# Allegro board PTB_V1_0.brd
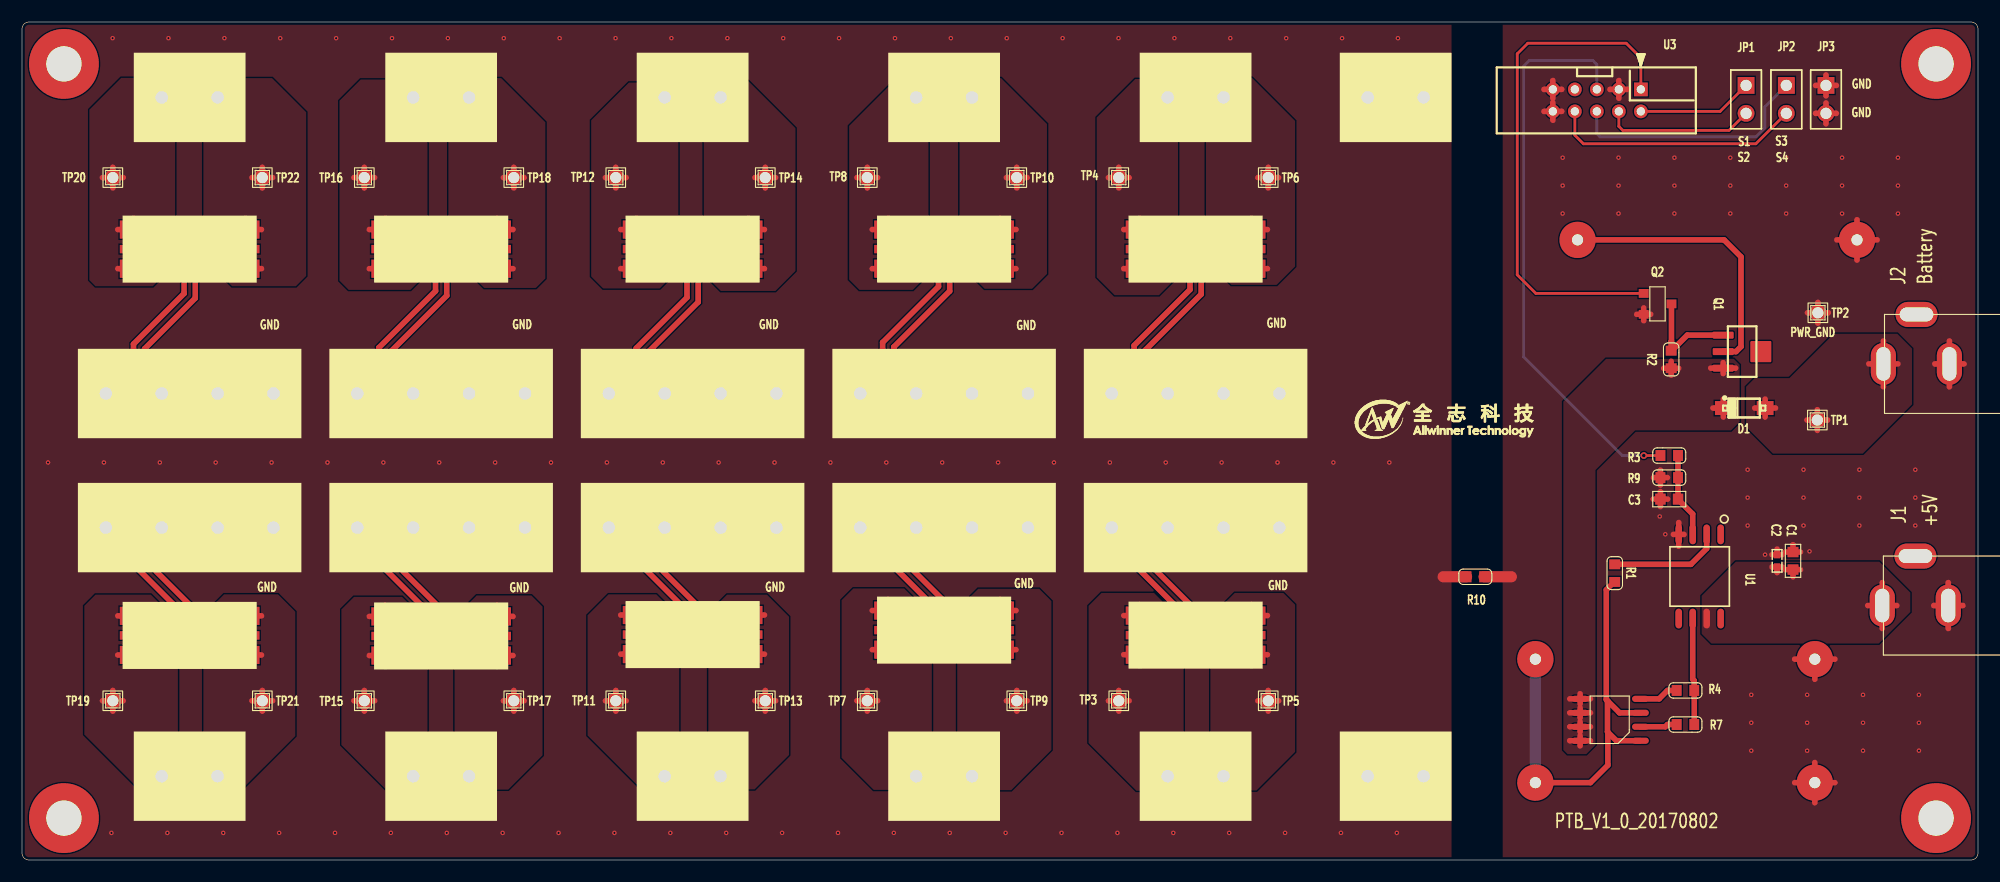
[diagram p0: board, top side]
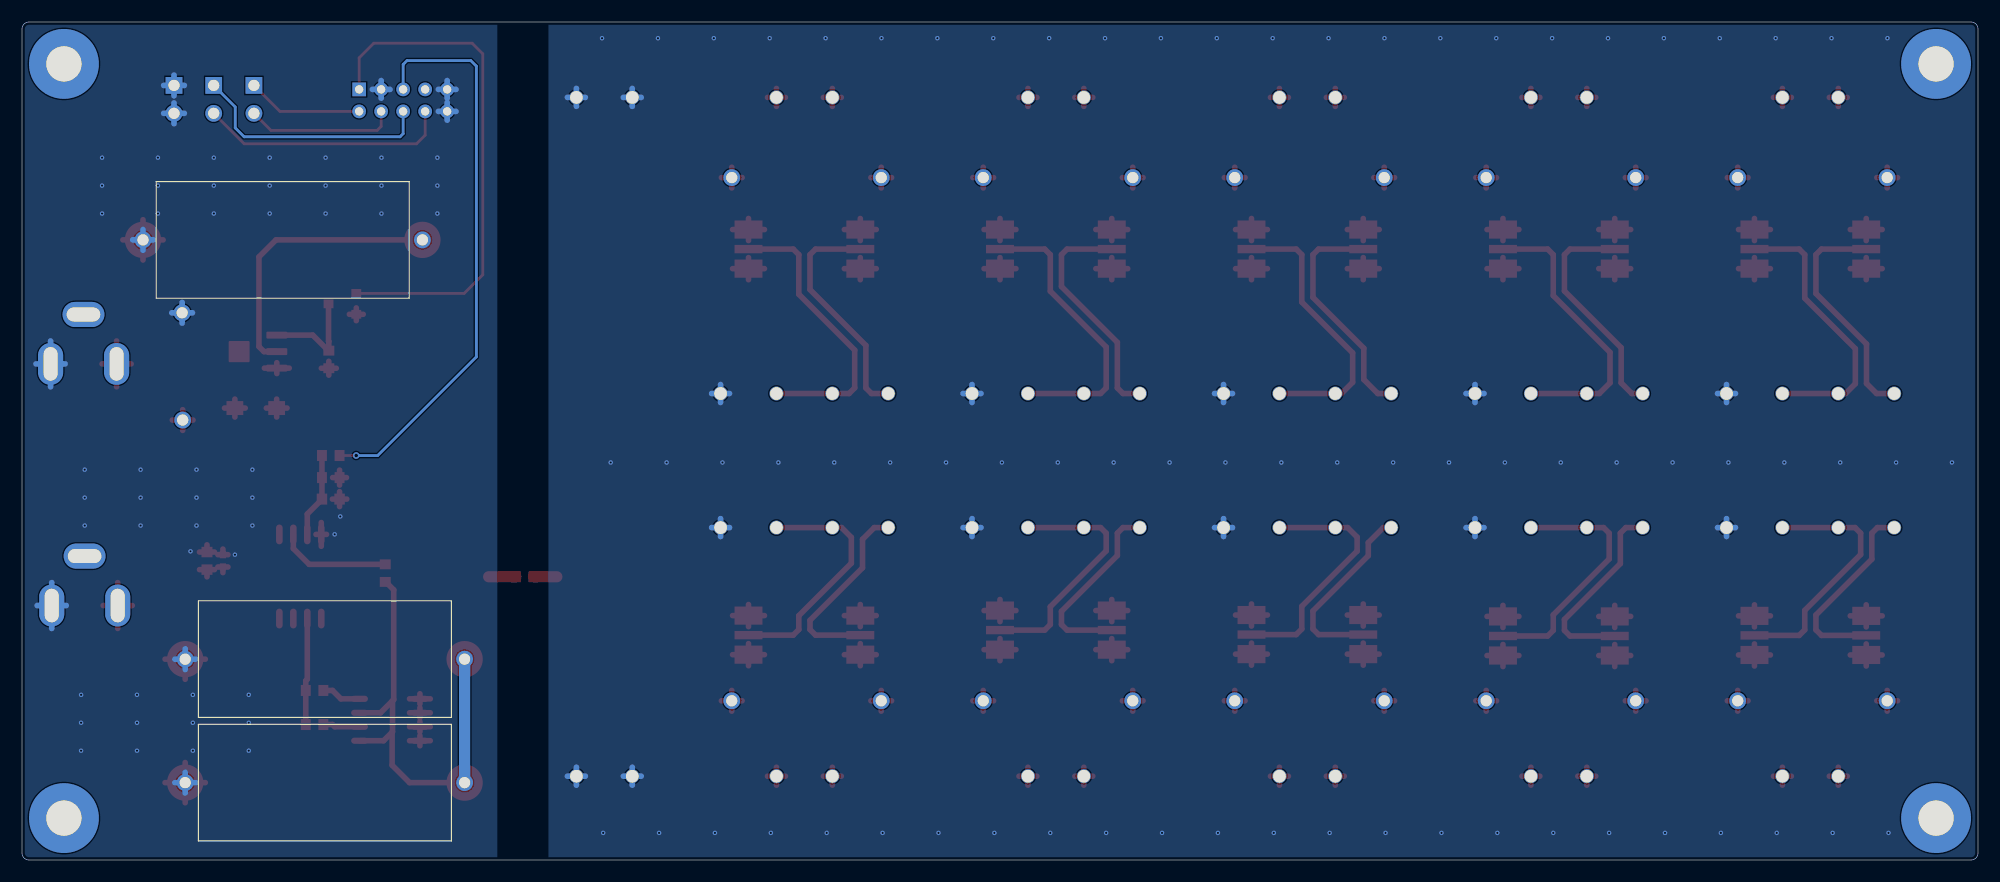
[diagram p1: board, bottom side, seen from below]

Outline 177.8 x 76.2 mm; copper layers: TOP, BOTTOM. Coordinates in mm from the lower left corner of the outline.
Outline path: 0,75.56 0,0.64 arc(0.19,0.19) 0.64,0 177.16,0 arc(177.61,0.19) 177.8,0.64 177.8,75.56 arc(177.61,76.01) 177.16,76.2 0.64,76.2 arc(0.19,76.01) 0,75.56

## Design rules (mm)
net group DP1: nets N15281681 N15281688
net group DP2: nets N15241367 N15241379
net group DP3: nets N15237127 N15237139
net group DP4: nets N15241519 N15241531
net group DP5: nets N15237638 N15237650
net group DP6: nets N15241743 N15241755
net group DP7: nets N15238147 N15238159
net group DP8: nets N15241967 N15241979
net group DP9: nets N15239532 N15239544
net group DP10: nets N15242243 N15242275

## Placement (name value [footprint] x y rotation side)
C1  10uF  [C0603]  160.99 27.2 270 top
C2  104  [C0402]  159.54 27.2 270 top
C3  104  [C0603]  149.73 32.82 0 top
CON1  CON2  [PWR2_448_304]  104.14 7.62 0 top
CON2  CON4  [PWR4_848_304]  99.06 30.23 0 top
CON3  CON2  [PWR2_448_304]  104.14 69.34 0 top
CON4  CON4  [PWR4_848_304]  99.06 42.42 0 top
CON5  CON2  [PWR2_448_304]  81.28 7.62 0 top
CON6  CON4  [PWR4_848_304]  76.2 30.23 0 top
CON7  CON2  [PWR2_448_304]  122.33 69.34 0 top
CON8  CON2  [PWR2_448_304]  81.28 69.34 0 top
CON9  CON4  [PWR4_848_304]  76.2 42.42 0 top
CON10  CON2  [PWR2_448_304]  58.42 7.62 0 top
CON11  CON4  [PWR4_848_304]  53.34 30.23 0 top
CON12  CON2  [PWR2_448_304]  58.42 69.34 0 top
CON13  CON4  [PWR4_848_304]  53.34 42.42 0 top
CON14  CON2  [PWR2_448_304]  35.56 7.62 0 top
CON15  CON4  [PWR4_848_304]  30.48 30.23 0 top
CON16  CON2  [PWR2_448_304]  122.33 7.62 0 top
CON17  CON2  [PWR2_448_304]  35.56 69.34 0 top
CON18  CON4  [PWR4_848_304]  30.48 42.42 0 top
CON19  CON2  [PWR2_448_304]  12.7 7.62 0 top
CON20  CON4  [PWR4_848_304]  7.62 30.23 0 top
CON21  CON2  [PWR2_448_304]  12.7 69.34 0 top
CON22  CON4  [PWR4_848_304]  7.62 42.42 0 top
D1  XBS104S14  [SOD123]  154.05 40.89 0 top
J1  DCIN  [PWR_JACK]  176.2 23.14 90 top
J2  DCOUT  [PWR_JACK]  176.3 45.11 90 top
JP1  GPIO  [SIP-2]  156.72 69.16 0 top
JP2  GPIO  [SIP-2]  160.38 69.16 0 top
JP3  GND  [SIP-2]  163.98 69.16 0 top
NOREF  -  [unnamed]  3.81 72.39 0 top
NOREF#2  -  [unnamed]  3.81 3.81 0 top
NOREF#3  -  [unnamed]  173.99 3.81 0 top
NOREF#4  -  [#2]  121.06 38.15 0 top
NOREF#5  -  [unnamed]  173.99 72.39 0 top
Q1  XP162A12A6PR  [SOT-89]  156.36 46.23 270 top
Q2  xp151  [SOT-23]  148.67 50.57 0 top
R1  0R  [R0603]  144.78 26.09 270 top
R2  100K  [R0603]  149.91 45.52 270 top
R3  0R  [R0603]  149.73 36.78 0 top
R4  0R  [R0603]  151.21 15.42 180 top
R5  4R  [SHUINI]  166.8 56.39 180 bottom
R6  4R  [SHUINI]  162.97 18.26 180 bottom
R7  0R  [R0603]  151.21 12.32 180 top
R8  4R  [SHUINI]  162.97 7.04 180 bottom
R9  10K  [R0603]  149.73 34.77 0 top
R10  0R  [R0603]  132.11 25.76 180 top
TP1  FD13  [TP_PAD]  163.19 40.01 0 top
TP2  FD12  [TP_PAD]  163.25 49.76 0 top
TP3  FD13  [TP_PAD]  99.69 14.48 0 top
TP4  FD13  [TP_PAD]  99.69 62.05 0 top
TP5  FD12  [TP_PAD]  113.28 14.48 0 top
TP6  FD12  [TP_PAD]  113.28 62.05 0 top
TP7  FD13  [TP_PAD]  76.83 14.48 0 top
TP8  FD13  [TP_PAD]  76.83 62.05 0 top
TP9  FD12  [TP_PAD]  90.42 14.48 0 top
TP10  FD12  [TP_PAD]  90.42 62.05 0 top
TP11  FD13  [TP_PAD]  53.98 14.48 0 top
TP12  FD13  [TP_PAD]  53.98 62.05 0 top
TP13  FD12  [TP_PAD]  67.56 14.48 0 top
TP14  FD12  [TP_PAD]  67.56 62.05 0 top
TP15  FD13  [TP_PAD]  31.11 14.48 0 top
TP16  FD13  [TP_PAD]  31.11 62.05 0 top
TP17  FD12  [TP_PAD]  44.7 14.48 0 top
TP18  FD12  [TP_PAD]  44.7 62.05 0 top
TP19  FD13  [TP_PAD]  8.26 14.48 0 top
TP20  FD13  [TP_PAD]  8.26 62.05 0 top
TP21  FD12  [TP_PAD]  21.84 14.48 0 top
TP22  FD12  [TP_PAD]  21.84 62.05 0 top
U1  OPA241UA  [SO8N]  152.5 25.78 270 top
U2  CSD88539ND  [SO8]  147.12 10.85 180 top
U3  -  [IDCN-10]  135.15 68.07 0 top
U4  100mR  [R1205]  101.6 22.23 0 top
U5  100mR  [R1205]  101.6 57.33 0 top
U6  100mR  [R1205]  78.74 22.68 0 top
U7  100mR  [R1205]  78.74 57.33 0 top
U8  100mR  [R1205]  55.88 22.28 0 top
U9  100mR  [R1205]  55.88 57.33 0 top
U10  100mR  [R1205]  33.02 22.15 0 top
U11  100mR  [R1205]  33.02 57.33 0 top
U12  100mR  [R1205]  10.16 22.2 0 top
U13  100mR  [R1205]  10.16 57.33 0 top

## Library data of the parts
C1 C2 = CAPACITOR
C3 = CAPACITOR_0
CON1 CON3 CON5 CON7 CON8 CON10 CON12 CON14 CON16 CON17 CON19 CON21 = CON2
CON2 CON4 CON6 CON9 CON11 CON13 CON15 CON18 CON20 CON22 = CON4
D1 = DIODE_SCHOTTKY: Tolerance: RichardLC
J1 J2 = BNC-2
JP1-JP3 = JUMPER-2_0: User Part Number: SIP-2
Q1 = MOSFET P DGS_0: Tolerance: RichardLC
Q2 = NMOS_xp151_SOT23_0
R1 R3 R4 R7 R9 R10 = R1_0805
R2 = RESISTOR
R5 R6 R8 = R
TP1-TP22 = T POINT S
U1 = OPA277_4
U2 = DUAL-NMOS
U3 = IDCN-10_0: Tolerance: RichardLC
U4-U13 = precise-R

## Footprints (pads in the part's own frame, mm; a bottom-side part is the same pattern mirrored in y, then rotated)
C0402
  rect 0.66x0.56 smd: 1(-0.56,0) 2(0.56,0)
C0603
  rect 0.95x1 smd: 1(-0.8,0) 2(0.8,0)
IDCN-10
  rect 1.246x1.246 hole 0.75: 1(12,2)
  round 1.246 hole 0.75: 2(12,0) 3(10,2) 4(10,0) 5(8,2) 6(8,0) 7(6,2) 8(6,0) 9(4,2) 10(4,0)
PWR2_448_304
  round 1.27 hole 1.143: 1(0,0) 2(5.08,0)
PWR4_848_304
  round 1.27 hole 1.143: 1(0,0) 2(5.08,0) 3(10.16,0) 4(15.24,0)
PWR_JACK
  oval 3.81x2.286 hole 3.048x1.27: 1(0,7.1) 2(0,1.1)
  oval 2.286x3.81 hole 1.27x3.048: 3(4.496,4.089)
R0603
  rect 0.9x1 smd: 1(-0.8,0) 2(0.8,0)
R1205
  rect 2.54x1.651 smd: 1(0,0) 3(0,-3.556) 4(10.16,0) 6(10.16,-3.556)
  rect 2.54x0.762 smd: 2(0,-1.778) 5(10.16,-1.778)
SHUINI
  round 3.3 hole 1.016: 1(0,0) 2(25.4,0)
SIP-2
  rect 1.524x1.524 hole 1.016: 1(0,1.27)
  round 1.524 hole 1.016: 2(0,-1.27)
SO8
  oval 1.524x0.559 smd: 1(0,0) 2(0,-1.27) 3(0,-2.54) 4(0,-3.81) 5(5.486,-3.81) 6(5.486,-2.54) 7(5.486,-1.27) 8(5.486,0)
SO8N
  oval 1.8x0.6 smd: 1(-3.825,1.905) 2(-3.825,0.635) 3(-3.825,-0.635) 4(-3.825,-1.905) 5(3.825,-1.905) 6(3.825,-0.635) 7(3.825,0.635) 8(3.825,1.905)
SOD123
  rect 1.524x1.27 smd: 1(4.399,0.201) 2(0.599,0.201)
SOT-23
  rect 0.9x0.8 smd: 1(-1.254,0.95) 2(-1.254,-0.95) 3(1.27,0)
SOT-89
  custom 1.93x1.9 smd: (0,1.7)
  custom 0.63x1.9 smd: 1(-1.5,-1.725) 2(0,-1.725) 3(1.5,-1.725)
TP_PAD
  round 1.524 hole 1.016: 1(0,0)
unnamed
  round 6.35 hole 3.2: (0,0)

## Nets
+5V: C1.2 C2.2 J1.1(CENTER1) U1.7(VDD/V+)
GND: CON2.4(GND) CON4.4(GND) CON6.4(GND) CON7.1(IN+) CON7.2(IN-) CON9.4(GND) CON11.4(GND) CON13.4(GND) CON15.4(GND) CON16.1(IN+) CON16.2(IN-) CON18.4(GND) CON20.4(GND) CON22.4(GND) R10.2
ATC-DAC(3.3): R3.1 U3.5
ATC-GPIO2: Q2.1(GATE) U3.1
BAT_IN: D1.2 Q1.3(S) R2.2 U2.5(D2_0) U2.6(D2_1) U2.7(D1_0) U2.8(D1_1)
GPIO2-S1: JP1.1 U3.2
GPIO2-S2: JP1.2 U3.4
GPIO2-S3: JP2.1 U3.6
GPIO2-S4: JP2.2 U3.8
PWR_GND: C1.1 C2.1 C3.1 J1.2(CENTER2) J2.2(CENTER2) JP3.1 JP3.2 Q2.2(SOURCE) R5.1 R6.1 R8.1 R9.1 R10.1 TP2.1(TP) U1.4(VSS/V-) U3.3 U3.9 U3.10
N15236078: CON1.1(IN+) TP3.1(TP) U4.1(IN) U4.3(.)
N15236116: CON1.2(IN-) TP5.1(TP) U4.4(OUT) U4.6(..)
N15237047: CON5.1(IN+) TP7.1(TP) U6.1(IN) U6.3(.)
N15237079: CON5.2(IN-) TP9.1(TP) U6.4(OUT) U6.6(..)
N15237127: CON6.1(VOUT+) U6.2(OUT+)
N15237139: CON6.2(VOUT-) CON6.3(VBUS) U6.5(OUT-)
N15237558: CON10.1(IN+) TP11.1(TP) U8.1(IN) U8.3(.)
N15237590: CON10.2(IN-) TP13.1(TP) U8.4(OUT) U8.6(..)
N15237638: CON11.1(VOUT+) U8.2(OUT+)
N15237650: CON11.2(VOUT-) CON11.3(VBUS) U8.5(OUT-)
N15238067: CON14.1(IN+) TP15.1(TP) U10.1(IN) U10.3(.)
N15238099: CON14.2(IN-) TP17.1(TP) U10.4(OUT) U10.6(..)
N15238147: CON15.1(VOUT+) U10.2(OUT+)
N15238159: CON15.2(VOUT-) CON15.3(VBUS) U10.5(OUT-)
N15239452: CON19.1(IN+) TP19.1(TP) U12.1(IN) U12.3(.)
N15239484: CON19.2(IN-) TP21.1(TP) U12.4(OUT) U12.6(..)
N15239532: CON20.1(VOUT+) U12.2(OUT+)
N15239544: CON20.2(VOUT-) CON20.3(VBUS) U12.5(OUT-)
N15241287: CON3.1(IN+) TP4.1(TP) U5.1(IN) U5.3(.)
N15241319: CON3.2(IN-) TP6.1(TP) U5.4(OUT) U5.6(..)
N15241367: CON4.1(VOUT+) U5.2(OUT+)
N15241379: CON4.2(VOUT-) CON4.3(VBUS) U5.5(OUT-)
N15241439: CON8.1(IN+) TP8.1(TP) U7.1(IN) U7.3(.)
N15241471: CON8.2(IN-) TP10.1(TP) U7.4(OUT) U7.6(..)
N15241519: CON9.1(VOUT+) U7.2(OUT+)
N15241531: CON9.2(VOUT-) CON9.3(VBUS) U7.5(OUT-)
N15241663: CON12.1(IN+) TP12.1(TP) U9.1(IN) U9.3(.)
N15241695: CON12.2(IN-) TP14.1(TP) U9.4(OUT) U9.6(..)
N15241743: CON13.1(VOUT+) U9.2(OUT+)
N15241755: CON13.2(VOUT-) CON13.3(VBUS) U9.5(OUT-)
N15241887: CON17.1(IN+) TP16.1(TP) U11.1(IN) U11.3(.)
N15241919: CON17.2(IN-) TP18.1(TP) U11.4(OUT) U11.6(..)
N15241967: CON18.1(VOUT+) U11.2(OUT+)
N15241979: CON18.2(VOUT-) CON18.3(VBUS) U11.5(OUT-)
N15242169: CON21.1(IN+) TP20.1(TP) U13.1(IN) U13.3(.)
N15242215: CON21.2(IN-) TP22.1(TP) U13.4(OUT) U13.6(..)
N15242243: CON22.1(VOUT+) U13.2(OUT+)
N15242275: CON22.2(VOUT-) CON22.3(VBUS) U13.5(OUT-)
N15242838: R1.1 U1.2(IN-)
N15242888: C3.2 R3.2 R9.2 U1.3(IN+)
N15248619: Q1.1(G) Q2.3(DRAIN) R2.1
N15248685: Q1.2(D) R5.2
N15263890: R1.2 R6.2 R8.2 U2.1(S1) U2.3(S2)
N15264303: R7.2 U2.2(G1)
N15264341: R4.2 U2.4(G2)
N15279686: D1.1 J2.1(CENTER1) TP1.1(TP)
N15281264: R4.1 R7.1 U1.6(OUT)
N15281681: CON2.1(VOUT+) U4.2(OUT+)
N15281688: CON2.2(VOUT-) CON2.3(VBUS) U4.5(OUT-)

Pads without a net: J1 3; J2 3; U1 1 5 8; U3 7

## Via types
v1: diameter 0.61, hole 0.33, TOP to BOTTOM, 1 via
v2: diameter 0.406, hole 0.203, TOP to BOTTOM, 122 vias

## Routing (per net, layer and track width the routed paths; a pad name or vN(x,y) marks a point on that pad's centre or on a via; arc(x,y) is an arc through that point)
+5V: length 10.2
  TOP w0.508: 169.1,21.06 J1.1 ; J1.1 167.78,23.14 ; J1.1 169.1,25.22 ; J1.1 170.42,23.14 ; 160.99,25.75 C1.2 ; C1.2 160.31,26.4 ; C1.2 161.66,26.4 ; 159.54,26.14 C2.2 ; C2.2 159.08,26.64 ; C2.2 160,26.64
GND: length 93.2
  TOP w0.508: CON11.4 68.58,31.04 ; CON11.4 68.58,29.41 ; CON11.4 69.39,30.23 ; CON11.4 67.77,30.23 ; 90.63,42.42 CON9.4 ; CON9.4 91.44,43.23 ; CON9.4 92.25,42.42 ; CON9.4 91.44,41.6 ; 127.41,6.81 CON16.2 ; CON16.2 126.59,7.62 ; CON16.2 128.22,7.62 ; CON16.2 127.41,8.43 ; CON2.4 114.3,31.04 ; CON2.4 115.11,30.23 ; CON2.4 113.49,30.23 ; CON2.4 114.3,29.41 ; CON18.4 46.53,42.42 ; CON18.4 44.91,42.42 ; CON18.4 45.72,41.6 ; CON18.4 45.72,43.23 ; CON7.1 122.33,70.16 ; CON7.1 123.14,69.34 ; CON7.1 122.33,68.53 ; CON7.1 121.51,69.34 ; 114.3,41.6 CON4.4 ; CON4.4 114.3,43.23 ; CON4.4 113.49,42.42 ; CON4.4 115.11,42.42 ; 45.72,29.41 CON15.4 ; CON15.4 44.91,30.23 ; CON15.4 46.53,30.23 ; CON15.4 45.72,31.04 ; 22.86,41.6 CON22.4 ; CON22.4 22.05,42.42 ; CON22.4 22.86,43.23 ; CON22.4 23.67,42.42 ; CON7.2 128.22,69.34 ; CON7.2 127.41,68.53 ; CON7.2 127.41,70.16 ; CON7.2 126.59,69.34 ; CON16.1 123.14,7.62 ; CON16.1 121.51,7.62 ; CON16.1 122.33,6.81 ; CON16.1 122.33,8.43 ; CON6.4 91.44,31.04 ; CON6.4 91.44,29.41 ; CON6.4 92.25,30.23 ; CON6.4 90.63,30.23 ; 68.58,41.6 CON13.4 ; CON13.4 67.77,42.42 ; CON13.4 68.58,43.23 ; CON13.4 69.39,42.42 ; CON20.4 22.86,31.04 ; CON20.4 23.67,30.23 ; CON20.4 22.05,30.23 ; CON20.4 22.86,29.41
  TOP w1.016: R10.2 129.18,25.76
  BOTTOM w0.508: 114.3,29.41 CON2.4 ; CON2.4 115.11,30.23 ; CON2.4 114.3,31.04 ; CON2.4 113.49,30.23 ; CON6.4 91.44,31.04 ; CON6.4 90.63,30.23 ; CON6.4 91.44,29.41 ; CON6.4 92.25,30.23 ; CON15.4 45.72,31.04 ; CON15.4 45.72,29.41 ; CON15.4 46.53,30.23 ; CON15.4 44.91,30.23 ; 121.51,69.34 CON7.1 ; CON7.1 122.33,68.53 ; CON7.1 123.14,69.34 ; CON7.1 122.33,70.16 ; 67.77,42.42 CON13.4 ; CON13.4 69.39,42.42 ; CON13.4 68.58,41.6 ; CON13.4 68.58,43.23 ; 114.3,41.6 CON4.4 ; CON4.4 114.3,43.23 ; CON4.4 113.49,42.42 ; CON4.4 115.11,42.42 ; CON9.4 92.25,42.42 ; CON9.4 90.63,42.42 ; CON9.4 91.44,41.6 ; CON9.4 91.44,43.23 ; CON20.4 23.67,30.23 ; CON20.4 22.05,30.23 ; CON20.4 22.86,29.41 ; CON20.4 22.86,31.04 ; CON16.1 123.14,7.62 ; CON16.1 121.51,7.62 ; CON16.1 122.33,6.81 ; CON16.1 122.33,8.43 ; CON11.4 69.39,30.23 ; CON11.4 67.77,30.23 ; CON11.4 68.58,29.41 ; CON11.4 68.58,31.04 ; 22.86,41.6 CON22.4 ; CON22.4 23.67,42.42 ; CON22.4 22.86,43.23 ; CON22.4 22.05,42.42 ; CON18.4 46.53,42.42 ; CON18.4 45.72,41.6 ; CON18.4 45.72,43.23 ; CON18.4 44.91,42.42 ; CON7.2 128.22,69.34 ; CON7.2 126.59,69.34 ; CON7.2 127.41,70.16 ; CON7.2 127.41,68.53 ; 127.41,6.81 CON16.2 ; CON16.2 128.22,7.62 ; CON16.2 126.59,7.62 ; CON16.2 127.41,8.43
  vias: v2(2.37,36.15) v2(7.45,36.15) v2(8.13,2.47) v2(8.23,74.73) v2(12.53,36.15) v2(13.21,2.47) v2(13.31,74.73) v2(17.61,36.15) v2(18.29,2.47) v2(18.39,74.73) v2(22.69,36.15) v2(23.37,2.47) v2(23.47,74.73) v2(27.77,36.15) v2(28.45,2.47) v2(28.55,74.73) v2(32.85,36.15) v2(33.53,2.47) v2(33.63,74.73) v2(37.93,36.15) v2(38.61,2.47) v2(38.71,74.73) v2(43.01,36.15) v2(43.69,2.47) v2(43.79,74.73) v2(48.09,36.15) v2(48.77,2.47) v2(48.87,74.73) v2(53.17,36.15) v2(53.85,2.47) v2(53.95,74.73) v2(58.25,36.15) v2(58.93,2.47) v2(59.03,74.73) v2(63.33,36.15) v2(64.01,2.47) v2(64.11,74.73) v2(68.41,36.15) v2(69.09,2.47) v2(69.19,74.73) v2(73.49,36.15) v2(74.17,2.47) v2(74.27,74.73) v2(78.57,36.15) v2(79.25,2.47) v2(79.35,74.73) v2(83.65,36.15) v2(84.33,2.47) v2(84.43,74.73) v2(88.73,36.15) v2(89.41,2.47) v2(89.51,74.73) v2(93.81,36.15) v2(94.49,2.47) v2(94.59,74.73) v2(98.89,36.15) v2(99.57,2.47) v2(99.67,74.73) v2(103.97,36.15) v2(104.65,2.47) v2(104.75,74.73) v2(109.05,36.15) v2(109.73,2.47) v2(109.83,74.73) v2(114.13,36.15) v2(114.81,2.47) v2(114.91,74.73) v2(119.21,36.15) v2(119.89,2.47) v2(119.99,74.73) v2(124.29,36.15) v2(124.97,2.47) v2(125.07,74.73)
ATC-DAC(3.3): length 51.9
  TOP w0.254: v1(147.42,36.78) R3.1
  BOTTOM w0.254: v1(147.42,36.78) 145.47,36.78 136.5,45.75 136.5,72.19 137.01,72.69 142.8,72.69 143.15,72.34 U3.5
ATC-GPIO2: length 47.3
  TOP w0.254: Q2.1 137.61,51.52 135.92,53.21 135.92,73.3 136.88,74.27 145.82,74.27 147.15,72.94 U3.1
BAT_IN: length 20.5
  TOP w0.508: U2.5 142.57,14.66 ; U2.5 141.63,15.11 ; U2.5 140.69,14.66 ; U2.5 141.63,14.2 ; R2.2 149.91,45.35 ; R2.2 149.23,44.72 ; R2.2 150.59,44.72 ; R2.2 149.91,44.09 ; U2.8 141.63,11.3 ; U2.8 141.63,10.39 ; U2.8 142.57,10.85 ; U2.8 140.69,10.85 ; U2.7 141.63,12.57 ; U2.7 142.57,12.12 ; U2.7 141.63,11.66 ; U2.7 140.69,12.12 ; Q1.3 154.64,45.22 ; Q1.3 155.77,44.73 ; Q1.3 154.64,44.23 ; Q1.3 153.51,44.73 ; 141.63,12.93 U2.6 ; U2.6 140.69,13.39 ; U2.6 141.63,13.84 ; U2.6 142.57,13.39 ; 153.71,41.09 D1.2 ; D1.2 155.59,41.09 ; D1.2 154.65,41.91 ; D1.2 154.65,40.28
GPIO2-S1: length 10.5
  TOP w0.254: JP1.1 154.36,68.07 U3.2
GPIO2-S2: length 13.7
  TOP w0.254: U3.4 145.15,66.71 145.52,66.34 155.17,66.34 JP1.2
GPIO2-S3: length 22.4
  BOTTOM w0.254: JP2.1 158.42,68.48 158.42,66.57 157.61,65.76 143.43,65.76 143.15,66.04 U3.6
GPIO2-S4: length 22.9
  TOP w0.254: JP2.2 157.61,65.13 141.94,65.13 141.15,65.91 U3.8
PWR_GND: length 117.1
  TOP w0.508: Q2.2 147.41,50.2 ; Q2.2 147.41,49.04 ; Q2.2 146.78,49.62 ; Q2.2 148.04,49.62 ; R5.1 168.63,56.39 ; R5.1 166.8,58.22 ; R5.1 166.8,54.56 ; R5.1 164.97,56.39 ; R6.1 164.79,18.26 ; R6.1 161.14,18.26 ; R6.1 162.97,16.43 ; U3.10 139.15,68.87 ; U3.10 139.15,67.27 ; U3.10 139.95,68.07 ; U3.10 138.35,68.07 ; J2.2 176.52,45.11 ; J2.2 175.2,43.03 ; J2.2 173.88,45.11 ; J2.2 175.2,47.19 ; C1.1 161.66,28 ; C1.1 160.99,28.66 ; C1.1 160.31,28 ; JP3.2 163.98,68.83 ; JP3.2 164.92,67.89 ; JP3.2 163.98,66.95 ; JP3.2 163.04,67.89 ; 138.35,70.07 U3.9 ; U3.9 139.15,70.87 ; U3.9 139.15,69.27 ; U3.9 139.95,70.07 ; 173.78,23.14 J1.2 ; J1.2 175.1,25.22 ; J1.2 175.1,21.06 ; J1.2 176.42,23.14 ; 145.15,69.27 U3.3 ; U3.3 145.95,70.07 ; U3.3 144.35,70.07 ; U3.3 145.15,70.87 ; R9.1 148.93,35.45 ; R9.1 148.93,34.09 ; R9.1 148.3,34.77 ; R9.1 149.56,34.77 ; TP2.1 164.19,49.76 ; TP2.1 163.25,48.82 ; TP2.1 162.31,49.76 ; TP2.1 163.25,50.7 ; C2.1 159.54,28.27 ; C2.1 160,27.76 ; C2.1 159.08,27.76 ; R8.1 164.79,7.04 ; R8.1 162.97,5.21 ; R8.1 162.97,8.86 ; R8.1 161.14,7.04 ; C3.1 149.59,32.82 ; C3.1 148.93,33.5 ; C3.1 148.93,32.14 ; C3.1 148.28,32.82 ; 150.6,28.53 U1.4 ; U1.4 150.6,30.68 ; U1.4 150.12,29.61 ; U1.4 151.07,29.61 ; JP3.1 164.92,70.43 ; JP3.1 163.98,69.49 ; JP3.1 163.04,70.43 ; JP3.1 163.98,71.37
  TOP w1.016: R10.1 135.38,25.76
  BOTTOM w0.508: U3.9 139.15,70.87 ; U3.9 139.15,69.27 ; U3.9 138.35,70.07 ; U3.9 139.95,70.07 ; JP3.1 163.98,71.37 ; JP3.1 164.92,70.43 ; JP3.1 163.04,70.43 ; JP3.1 163.98,69.49 ; 139.15,67.27 U3.10 ; U3.10 139.95,68.07 ; U3.10 138.35,68.07 ; U3.10 139.15,68.87 ; 162.31,49.76 TP2.1 ; TP2.1 164.19,49.76 ; TP2.1 163.25,48.82 ; TP2.1 163.25,50.7 ; 162.97,17.32 R6.1 ; R6.1 163.91,18.26 ; R6.1 162.03,18.26 ; R6.1 162.97,19.2 ; 175.2,43.03 J2.2 ; J2.2 175.2,47.19 ; J2.2 173.88,45.11 ; J2.2 176.52,45.11 ; J1.2 175.1,25.22 ; J1.2 175.1,21.06 ; J1.2 176.42,23.14 ; J1.2 173.78,23.14 ; U3.3 145.95,70.07 ; U3.3 145.15,69.27 ; U3.3 145.15,70.87 ; U3.3 144.35,70.07 ; JP3.2 164.92,67.89 ; JP3.2 163.98,68.83 ; JP3.2 163.98,66.95 ; JP3.2 163.04,67.89 ; 165.86,56.39 R5.1 ; R5.1 166.8,55.45 ; R5.1 167.74,56.39 ; R5.1 166.8,57.33 ; R8.1 163.91,7.04 ; R8.1 162.03,7.04 ; R8.1 162.97,6.1 ; R8.1 162.97,7.98
  vias: v2(140.04,63.86) v2(140.04,61.32) v2(140.04,58.78) v2(145.12,63.86) v2(145.12,61.32) v2(145.12,58.78) v2(148.87,31.24) v2(149.38,29.62) v2(150.2,63.86) v2(150.2,61.32) v2(150.2,58.78) v2(155.28,63.86) v2(155.28,61.32) v2(155.28,58.78) v2(156.86,35.49) v2(156.86,32.95) v2(156.86,30.41) v2(157.19,15.02) v2(157.19,12.48) v2(157.19,9.94) v2(158.45,27.76) v2(160.36,63.86) v2(160.36,61.32) v2(160.36,58.78) v2(161.94,35.49) v2(161.94,32.95) v2(161.94,30.41) v2(162.27,15.02) v2(162.27,12.48) v2(162.27,9.94) v2(162.48,28.07) v2(165.44,63.86) v2(165.44,61.32) v2(165.44,58.78) v2(167.02,35.49) v2(167.02,32.95) v2(167.02,30.41) v2(167.35,15.02) v2(167.35,12.48) v2(167.35,9.94) v2(170.52,63.86) v2(170.52,61.32) v2(170.52,58.78) v2(172.1,35.49) v2(172.1,32.95) v2(172.1,30.41) v2(172.43,15.02) v2(172.43,12.48) v2(172.43,9.94)
N15236078: length 16.8
  TOP w0.508: U4.3 101.6,19.67 ; U4.3 101.6,17.67 ; U4.3 100.15,18.67 ; U4.3 103.05,18.67 ; TP3.1 99.69,15.42 ; TP3.1 99.69,13.54 ; TP3.1 100.64,14.48 ; TP3.1 98.75,14.48 ; CON1.1 104.14,8.43 ; CON1.1 103.33,7.62 ; CON1.1 104.95,7.62 ; CON1.1 104.14,6.81 ; 100.15,22.23 U4.1 ; U4.1 103.05,22.23 ; U4.1 101.6,21.22 ; U4.1 101.6,23.23
N15236116: length 16.8
  TOP w0.508: U4.4 111.76,23.23 ; U4.4 110.31,22.23 ; U4.4 113.21,22.23 ; U4.4 111.76,21.22 ; TP5.1 113.28,15.42 ; TP5.1 114.22,14.48 ; TP5.1 113.28,13.54 ; TP5.1 112.34,14.48 ; 109.22,6.81 CON1.2 ; CON1.2 110.03,7.62 ; CON1.2 108.41,7.62 ; CON1.2 109.22,8.43 ; 110.31,18.67 U4.6 ; U4.6 111.76,19.67 ; U4.6 113.21,18.67 ; U4.6 111.76,17.67
N15237047: length 16.8
  TOP w0.508: U6.3 78.74,20.13 ; U6.3 77.29,19.13 ; U6.3 78.74,18.12 ; U6.3 80.19,19.13 ; 78.74,21.68 U6.1 ; U6.1 77.29,22.68 ; U6.1 80.19,22.68 ; U6.1 78.74,23.69 ; TP7.1 76.83,15.42 ; TP7.1 75.89,14.48 ; TP7.1 77.78,14.48 ; TP7.1 76.83,13.54 ; CON5.1 82.09,7.62 ; CON5.1 80.47,7.62 ; CON5.1 81.28,8.43 ; CON5.1 81.28,6.81
N15237079: length 16.8
  TOP w0.508: U6.4 88.9,23.69 ; U6.4 90.35,22.68 ; U6.4 88.9,21.68 ; U6.4 87.45,22.68 ; 85.55,7.62 CON5.2 ; CON5.2 87.17,7.62 ; CON5.2 86.36,6.81 ; CON5.2 86.36,8.43 ; 90.42,13.54 TP9.1 ; TP9.1 89.48,14.48 ; TP9.1 90.42,15.42 ; TP9.1 91.36,14.48 ; 87.45,19.13 U6.6 ; U6.6 88.9,18.12 ; U6.6 90.35,19.13 ; U6.6 88.9,20.13
N15237127: length 17.4
  TOP w0.508: CON6.1 77.72,30.23 78.23,29.72 78.23,27.69 83.31,22.61 83.31,21.41 82.8,20.9 U6.2
N15237139: length 22.5
  TOP w0.508: U6.5 84.84,20.9 84.33,21.41 84.33,23.03 79.25,28.11 79.25,29.72 79.76,30.23 CON6.2 CON6.3
N15237558: length 16.8
  TOP w0.508: CON10.1 58.42,8.43 ; CON10.1 59.23,7.62 ; CON10.1 57.61,7.62 ; CON10.1 58.42,6.81 ; 54.43,18.72 U8.3 ; U8.3 55.88,17.72 ; U8.3 57.33,18.72 ; U8.3 55.88,19.72 ; TP11.1 53.98,15.42 ; TP11.1 53.03,14.48 ; TP11.1 53.98,13.54 ; TP11.1 54.92,14.48 ; 54.43,22.28 U8.1 ; U8.1 57.33,22.28 ; U8.1 55.88,23.28 ; U8.1 55.88,21.27
N15237590: length 16.8
  TOP w0.508: 62.69,7.62 CON10.2 ; CON10.2 64.31,7.62 ; CON10.2 63.5,8.43 ; CON10.2 63.5,6.81 ; 66.04,17.72 U8.6 ; U8.6 64.59,18.72 ; U8.6 66.04,19.72 ; U8.6 67.49,18.72 ; U8.4 67.49,22.28 ; U8.4 66.04,21.27 ; U8.4 66.04,23.28 ; U8.4 64.59,22.28 ; 66.62,14.48 TP13.1 ; TP13.1 68.5,14.48 ; TP13.1 67.56,15.42 ; TP13.1 67.56,13.54
N15237638: length 17.4
  TOP w0.508: CON11.1 54.05,30.23 55.42,28.85 55.42,27.67 60.45,22.64 60.45,21.01 59.94,20.5 U8.2
N15237650: length 22.6
  TOP w0.508: U8.5 61.98,20.5 61.47,21.01 61.47,23.06 56.44,28.09 56.44,29.36 57.3,30.23 CON11.2 CON11.3
N15238067: length 16.8
  TOP w0.508: 31.11,13.54 TP15.1 ; TP15.1 31.11,15.42 ; TP15.1 30.17,14.48 ; TP15.1 32.06,14.48 ; U10.1 34.47,22.15 ; U10.1 33.02,23.15 ; U10.1 31.57,22.15 ; U10.1 33.02,21.14 ; U10.3 34.47,18.59 ; U10.3 33.02,19.6 ; U10.3 31.57,18.59 ; U10.3 33.02,17.59 ; CON14.1 35.56,8.43 ; CON14.1 35.56,6.81 ; CON14.1 34.75,7.62 ; CON14.1 36.37,7.62
N15238099: length 16.8
  TOP w0.508: 41.73,22.15 U10.4 ; U10.4 44.63,22.15 ; U10.4 43.18,21.14 ; U10.4 43.18,23.15 ; CON14.2 40.64,8.43 ; CON14.2 40.64,6.81 ; CON14.2 41.45,7.62 ; CON14.2 39.83,7.62 ; U10.6 44.63,18.59 ; U10.6 41.73,18.59 ; U10.6 43.18,17.59 ; U10.6 43.18,19.6 ; 44.7,13.54 TP17.1 ; TP17.1 43.76,14.48 ; TP17.1 45.64,14.48 ; TP17.1 44.7,15.42
N15238147: length 18
  TOP w0.508: U10.2 37.08,20.37 37.59,20.88 37.59,21.87 32.51,26.95 32.51,29.72 32,30.23 CON15.1
N15238159: length 23
  TOP w0.508: U10.5 39.12,20.37 38.61,20.88 38.61,22.29 33.53,27.37 33.53,29.72 34.04,30.23 CON15.2 CON15.3
N15239452: length 16.8
  TOP w0.508: TP19.1 9.2,14.48 ; TP19.1 7.31,14.48 ; TP19.1 8.26,13.54 ; TP19.1 8.26,15.42 ; U12.1 11.61,22.2 ; U12.1 10.16,21.2 ; U12.1 10.16,23.2 ; U12.1 8.71,22.2 ; CON19.1 13.51,7.62 ; CON19.1 12.7,8.43 ; CON19.1 11.89,7.62 ; CON19.1 12.7,6.81 ; U12.3 11.61,18.64 ; U12.3 10.16,17.64 ; U12.3 10.16,19.65 ; U12.3 8.71,18.64
N15239484: length 16.8
  TOP w0.508: 21.84,13.54 TP21.1 ; TP21.1 20.9,14.48 ; TP21.1 22.78,14.48 ; TP21.1 21.84,15.42 ; CON19.2 17.78,8.43 ; CON19.2 18.59,7.62 ; CON19.2 17.78,6.81 ; CON19.2 16.97,7.62 ; U12.4 20.32,23.2 ; U12.4 20.32,21.2 ; U12.4 21.77,22.2 ; U12.4 18.87,22.2 ; U12.6 21.77,18.64 ; U12.6 20.32,19.65 ; U12.6 18.87,18.64 ; U12.6 20.32,17.64
N15239532: length 17.9
  TOP w0.508: U12.2 14.22,20.42 14.73,20.93 14.73,22.28 9.65,27.36 9.65,29.72 9.14,30.23 CON20.1
N15239544: length 23
  TOP w0.508: U12.5 16.26,20.42 15.75,20.93 15.75,22.7 10.67,27.78 10.67,29.72 11.18,30.23 CON20.2 CON20.3
N15241287: length 16.8
  TOP w0.508: 104.14,68.53 CON3.1 ; CON3.1 104.95,69.34 ; CON3.1 104.14,70.16 ; CON3.1 103.33,69.34 ; 100.15,53.77 U5.3 ; U5.3 101.6,54.78 ; U5.3 101.6,52.77 ; U5.3 103.05,53.77 ; TP4.1 100.64,62.05 ; TP4.1 99.69,61.11 ; TP4.1 99.69,62.99 ; TP4.1 98.75,62.05 ; U5.1 101.6,58.33 ; U5.1 100.15,57.33 ; U5.1 101.6,56.32 ; U5.1 103.05,57.33
N15241319: length 16.8
  TOP w0.508: U5.6 111.76,54.78 ; U5.6 111.76,52.77 ; U5.6 113.21,53.77 ; U5.6 110.31,53.77 ; U5.4 111.76,58.33 ; U5.4 113.21,57.33 ; U5.4 111.76,56.32 ; U5.4 110.31,57.33 ; TP6.1 114.22,62.05 ; TP6.1 113.28,61.11 ; TP6.1 112.34,62.05 ; TP6.1 113.28,62.99 ; CON3.2 110.03,69.34 ; CON3.2 109.22,70.16 ; CON3.2 108.41,69.34 ; CON3.2 109.22,68.53
N15241367: length 21.2
  TOP w0.508: U5.2 105.66,55.55 106.17,55.04 106.17,51.87 101.09,46.79 101.09,42.93 100.58,42.42 CON4.1
N15241379: length 26.3
  TOP w0.508: CON4.3 CON4.2 102.62,42.42 102.11,42.93 102.11,46.37 107.19,51.45 107.19,55.04 107.7,55.55 U5.5
N15241439: length 16.8
  TOP w0.508: 77.29,53.77 U7.3 ; U7.3 80.19,53.77 ; U7.3 78.74,54.78 ; U7.3 78.74,52.77 ; 81.28,68.53 CON8.1 ; CON8.1 80.47,69.34 ; CON8.1 81.28,70.16 ; CON8.1 82.09,69.34 ; U7.1 80.19,57.33 ; U7.1 77.29,57.33 ; U7.1 78.74,56.32 ; U7.1 78.74,58.33 ; 75.89,62.05 TP8.1 ; TP8.1 76.83,61.11 ; TP8.1 77.78,62.05 ; TP8.1 76.83,62.99
N15241471: length 16.8
  TOP w0.508: U7.6 88.9,54.78 ; U7.6 90.35,53.77 ; U7.6 87.45,53.77 ; U7.6 88.9,52.77 ; 86.36,68.53 CON8.2 ; CON8.2 87.17,69.34 ; CON8.2 86.36,70.16 ; CON8.2 85.55,69.34 ; 88.9,56.32 U7.4 ; U7.4 90.35,57.33 ; U7.4 88.9,58.33 ; U7.4 87.45,57.33 ; 89.48,62.05 TP10.1 ; TP10.1 90.42,62.99 ; TP10.1 91.36,62.05 ; TP10.1 90.42,61.11
N15241519: length 21.2
  TOP w0.508: CON9.1 77.72,42.42 78.23,42.93 78.23,47.07 83.31,52.15 83.31,55.04 82.8,55.55 U7.2
N15241531: length 26.3
  TOP w0.508: U7.5 84.84,55.55 84.33,55.04 84.33,51.73 79.25,46.65 79.25,42.93 79.76,42.42 CON9.2 CON9.3
N15241663: length 16.8
  TOP w0.508: 55.88,56.32 U9.1 ; U9.1 54.43,57.33 ; U9.1 55.88,58.33 ; U9.1 57.33,57.33 ; 55.88,52.77 U9.3 ; U9.3 57.33,53.77 ; U9.3 55.88,54.78 ; U9.3 54.43,53.77 ; 57.61,69.34 CON12.1 ; CON12.1 58.42,70.16 ; CON12.1 58.42,68.53 ; CON12.1 59.23,69.34 ; 53.98,61.11 TP12.1 ; TP12.1 54.92,62.05 ; TP12.1 53.03,62.05 ; TP12.1 53.98,62.99
N15241695: length 16.8
  TOP w0.508: U9.6 67.49,53.77 ; U9.6 66.04,52.77 ; U9.6 66.04,54.78 ; U9.6 64.59,53.77 ; U9.4 67.49,57.33 ; U9.4 66.04,58.33 ; U9.4 66.04,56.32 ; U9.4 64.59,57.33 ; CON12.2 64.31,69.34 ; CON12.2 63.5,70.16 ; CON12.2 62.69,69.34 ; CON12.2 63.5,68.53 ; 66.62,62.05 TP14.1 ; TP14.1 67.56,61.11 ; TP14.1 68.5,62.05 ; TP14.1 67.56,62.99
N15241743: length 21.1
  TOP w0.508: CON13.1 54.56,42.42 55.83,43.69 55.83,46.53 60.45,51.16 60.45,55.04 59.94,55.55 U9.2
N15241755: length 25.4
  TOP w0.508: U9.5 61.98,55.55 61.47,55.04 61.47,50.73 56.85,46.11 56.85,43.43 57.86,42.42 CON13.2 CON13.3
N15241887: length 16.8
  TOP w0.508: TP16.1 31.11,62.99 ; TP16.1 30.17,62.05 ; TP16.1 31.11,61.11 ; TP16.1 32.06,62.05 ; 34.75,69.34 CON17.1 ; CON17.1 36.37,69.34 ; CON17.1 35.56,68.53 ; CON17.1 35.56,70.16 ; 31.57,57.33 U11.1 ; U11.1 33.02,58.33 ; U11.1 34.47,57.33 ; U11.1 33.02,56.32 ; 33.02,52.77 U11.3 ; U11.3 34.47,53.77 ; U11.3 33.02,54.78 ; U11.3 31.57,53.77
N15241919: length 16.8
  TOP w0.508: U11.6 43.18,54.78 ; U11.6 41.73,53.77 ; U11.6 44.63,53.77 ; U11.6 43.18,52.77 ; 43.76,62.05 TP18.1 ; TP18.1 44.7,61.11 ; TP18.1 44.7,62.99 ; TP18.1 45.64,62.05 ; 39.83,69.34 CON17.2 ; CON17.2 40.64,68.53 ; CON17.2 41.45,69.34 ; CON17.2 40.64,70.16 ; 41.73,57.33 U11.4 ; U11.4 43.18,56.32 ; U11.4 43.18,58.33 ; U11.4 44.63,57.33
N15241967: length 20.9
  TOP w0.508: U11.2 37.08,55.55 37.59,55.04 37.59,51.74 32.44,46.58 32.44,43.38 31.47,42.42 CON18.1
N15241979: length 26.2
  TOP w0.508: U11.5 39.12,55.55 38.61,55.04 38.61,51.32 33.45,46.16 33.45,43.38 34.42,42.42 CON18.2 CON18.3
N15242169: length 16.8
  TOP w0.508: CON21.1 12.7,70.16 ; CON21.1 12.7,68.53 ; CON21.1 11.89,69.34 ; CON21.1 13.51,69.34 ; 8.26,61.11 TP20.1 ; TP20.1 8.26,62.99 ; TP20.1 7.31,62.05 ; TP20.1 9.2,62.05 ; 8.71,53.77 U13.3 ; U13.3 10.16,54.78 ; U13.3 11.61,53.77 ; U13.3 10.16,52.77 ; U13.1 10.16,58.33 ; U13.1 10.16,56.32 ; U13.1 8.71,57.33 ; U13.1 11.61,57.33
N15242215: length 16.8
  TOP w0.508: 16.97,69.34 CON21.2 ; CON21.2 17.78,68.53 ; CON21.2 18.59,69.34 ; CON21.2 17.78,70.16 ; TP22.1 22.78,62.05 ; TP22.1 21.84,62.99 ; TP22.1 20.9,62.05 ; TP22.1 21.84,61.11 ; U13.4 20.32,58.33 ; U13.4 21.77,57.33 ; U13.4 18.87,57.33 ; U13.4 20.32,56.32 ; 20.32,52.77 U13.6 ; U13.6 21.77,53.77 ; U13.6 20.32,54.78 ; U13.6 18.87,53.77
N15242243: length 21.3
  TOP w0.508: CON22.1 9.22,42.42 10.13,43.33 10.13,46.91 14.73,51.51 14.73,55.04 14.22,55.55 U13.2
N15242275: length 25.4
  TOP w0.508: CON22.3 CON22.2 12.04,42.42 11.15,43.31 11.15,46.49 15.75,51.09 15.75,55.04 16.26,55.55 U13.5
N15242838: length 10.2
  TOP w0.508: R1.1 151.7,26.89 153.14,28.32 U1.2
N15242888: length 7.7
  TOP w0.508: U1.3 151.87,31.46 150.53,32.79 C3.2 R9.2 R3.2
N15248619: length 9.6
  TOP w0.508: Q2.3 149.94,47.17 149.91,47.15 R2.1 149.96,46.32 151.37,47.73 Q1.1
N15248685: length 25.5
  TOP w0.508: R5.2 154.71,56.39 156.26,54.84 156.26,46.69 155.8,46.23 Q1.2
N15263890: length 42.3
  TOP w0.508: U2.1 144.93,10.85 144.16,11.62 ; 144.16,11.62 144.12,11.66 144.12,14.43 144.15,14.45 ; 144.16,11.62 144.16,8.62 142.57,7.04 R8.2 ; R1.2 144.73,25.29 144.01,24.57 144.01,14.59 144.15,14.45 ; 144.15,14.45 145.21,13.39 U2.3
  BOTTOM w1.016: R6.2 R8.2
N15264303: length 3.4
  TOP w0.508: R7.2 149.58,12.32 149.37,12.12 U2.2
N15264341: length 3.6
  TOP w0.508: U2.4 148.81,14.66 149.58,15.42 R4.2
N15279686: length 14.1
  TOP w0.508: 162.25,40.01 TP1.1 ; TP1.1 163.19,40.95 ; TP1.1 164.14,40.01 ; TP1.1 163.19,39.06 ; J2.1 170.52,45.11 ; J2.1 169.2,47.19 ; J2.1 169.2,43.03 ; J2.1 167.88,45.11 ; 158.45,40.28 D1.1 ; D1.1 158.45,41.91 ; D1.1 157.51,41.09 ; D1.1 159.39,41.09
N15281264: length 9.7
  TOP w0.508: U1.6 151.87,16.44 152.01,16.3 R4.1 R7.1
N15281681: length 17.7
  TOP w0.508: CON2.1 100.33,30.23 101.4,29.16 101.4,26.57 106.17,21.79 106.17,20.95 105.66,20.45 U4.2
N15281688: length 22.3
  TOP w0.508: U4.5 107.7,20.45 107.19,20.95 107.19,22.21 102.41,26.99 102.41,29.34 103.3,30.23 CON2.2 CON2.3

## Copper pours and planes (outline as drawn; the poured copper is in the pictures)
+5V on TOP: 171.65,22.56 171.65,24.31 168.83,27.13 155.78,27.13 152.68,24.03 152.68,20.57 153.57,19.68 168.78,19.68
BAT_IN on TOP: 143.99,45.57 155.6,45.57 156.13,45.03 156.13,39.85 155.35,39.07 146.63,39.07 143.03,35.46 143.03,10.46 142.19,9.63 140.49,9.63 140.11,10.01 140.11,41.68
N15236078 on TOP: 104.6,6.3 101.3,6.3 96.95,10.64 96.95,23.11 98.12,24.28 102.9,24.28 105.59,21.59 105.59,7.29
N15236116 on TOP: 108.64,6.32 112.22,6.32 115.72,9.83 115.72,23.22 114.66,24.28 110.24,24.28 108.03,22.07 108.03,6.93
N15237047 on TOP: 81.94,6.38 77.42,6.38 74.5,9.3 74.5,23.62 75.56,24.69 80.19,24.69 82.7,22.17 82.7,7.14
N15237079 on TOP: 86.06,6.35 89.92,6.35 93.57,10.01 93.57,23.55 92.46,24.66 86.92,24.66 85.01,22.76 85.01,7.39
N15237558 on TOP: 58.95,6.35 56.39,6.35 51.41,11.33 51.41,22.25 53.31,24.16 57.66,24.16 59.74,22.07 59.74,7.14
N15237590 on TOP: 63.35,6.43 66.6,6.43 69.72,9.55 69.72,22.12 67.72,24.13 64.08,24.13 62.38,22.43 62.38,7.42 63.35,6.45
N15238067 on TOP: 35.92,6.38 33.12,6.38 29.03,10.46 29.03,22.78 30.18,23.93 34.54,23.93 36.86,21.62 36.86,7.32
N15238099 on TOP: 40.03,6.4 44.2,6.4 47.32,9.53 47.32,23.04 46.3,24.05 41.33,24.05 39.32,22.05 39.32,7.11
N15239452 on TOP: 13.64,6.07 11,6.07 5.66,11.4 5.66,23.11 6.68,24.13 11.71,24.13 14.17,21.67 14.17,6.6
N15239484 on TOP: 17.22,6.02 19.58,6.02 24.84,11.28 24.84,22.58 23.27,24.16 18.36,24.16 16.48,22.28 16.48,6.76
N15241287 on TOP: 104.88,71.02 101.19,71.02 97.69,67.51 97.69,52.98 99.31,51.36 103.35,51.36 105.08,53.09 105.08,70.82
N15241319 on TOP: 107.72,71.12 111.81,71.12 115.72,67.21 115.72,53.98 114.05,52.3 109.93,52.3 107.62,54.61 107.62,71.02
N15241439 on TOP: 81.64,71.02 79.45,71.02 75.18,66.75 75.18,52.78 76.12,51.84 80.98,51.84 82.4,53.26 82.4,70.26
N15241471 on TOP: 85.37,71.09 89,71.09 93.17,66.93 93.17,53.29 91.82,51.94 87.5,51.94 85.22,54.23 85.22,70.94
N15241663 on TOP: 59,70.69 55.17,70.69 51.74,67.26 51.74,53.06 52.83,51.97 57.96,51.97 59.66,53.67 59.66,70.03
N15241695 on TOP: 62.2,70.97 65.89,70.97 70.31,66.55 70.31,53.57 68.48,51.74 63.53,51.74 61.98,53.29 61.98,70.74
N15241887 on TOP: 36.35,70.97 30.78,70.97 28.85,69.04 28.85,52.68 29.69,51.84 35.31,51.84 36.86,53.39 36.86,70.46
N15241919 on TOP: 39.04,71.09 43.56,71.09 47.57,67.08 47.57,52.88 46.71,52.02 42.01,52.02 38.76,55.27 38.76,70.82
N15242169 on TOP: 13.34,71.12 9.02,71.12 6.12,68.22 6.12,52.73 6.68,52.17 11.89,52.17 13.92,54.2 13.92,70.54
N15242215 on TOP: 16.69,71.09 22.73,71.09 25.83,68 25.83,53.11 24.89,52.17 19.1,52.17 16.48,54.79 16.48,70.89
N15279686 on TOP: 171.81,46.51 171.81,41.43 167.34,36.96 159.16,36.96 156.72,39.4 156.72,43.03 157.51,43.81 160.66,43.81 164.69,47.85 170.46,47.85
GND on TOP, BOTTOM: 0.64,0.25 0.37,0.37 0.25,0.64 0.25,75.57 0.37,75.83 0.64,75.95 129.95,75.95 129.95,0.25
PWR_GND on TOP, BOTTOM: 134.59,0.25 134.59,75.95 177.17,75.95 177.43,75.83 177.55,75.57 177.55,0.64 177.43,0.37 177.17,0.25

## Text on the board
Ref Des/Silkscreen Top: GND | S2 | S1 | S3 | S4 | PWR_GND | PTB_V1_0_20170802 | Battery | +5V
DISPLAY_TOP: FIGURE | SIZE | 8.0 | 13.0 | 29.53 | 40.0 | 45.0 | 125.98 | 120.0x50.0 | DRILL CHART: TOP to BOTTOM | ALL UNITS ARE IN MILS | PLATED | QTY | 122 | 1 | 10 | 6 | 28 | 64 | 4 | 2
COMPVAL_TYPE_TOP: FIGURE | SIZE | 95.0x25.0 | 95.0x60.0 | DRILL CHART: TOP to TOP | ALL UNITS ARE IN MILS | PLATED | QTY | 20 | 40
